# Altium PCB INA219_shield.PcbDoc
Units mm, origin at the board's own origin, x right, y up, seen from the top; angles counter-clockwise.
Board outline 41.38 x 28 mm, 2 copper layers (Top Layer, Bottom Layer), stack 1.571 mm thick; 13 components, 9 nets, 44 pads, 75 vias.
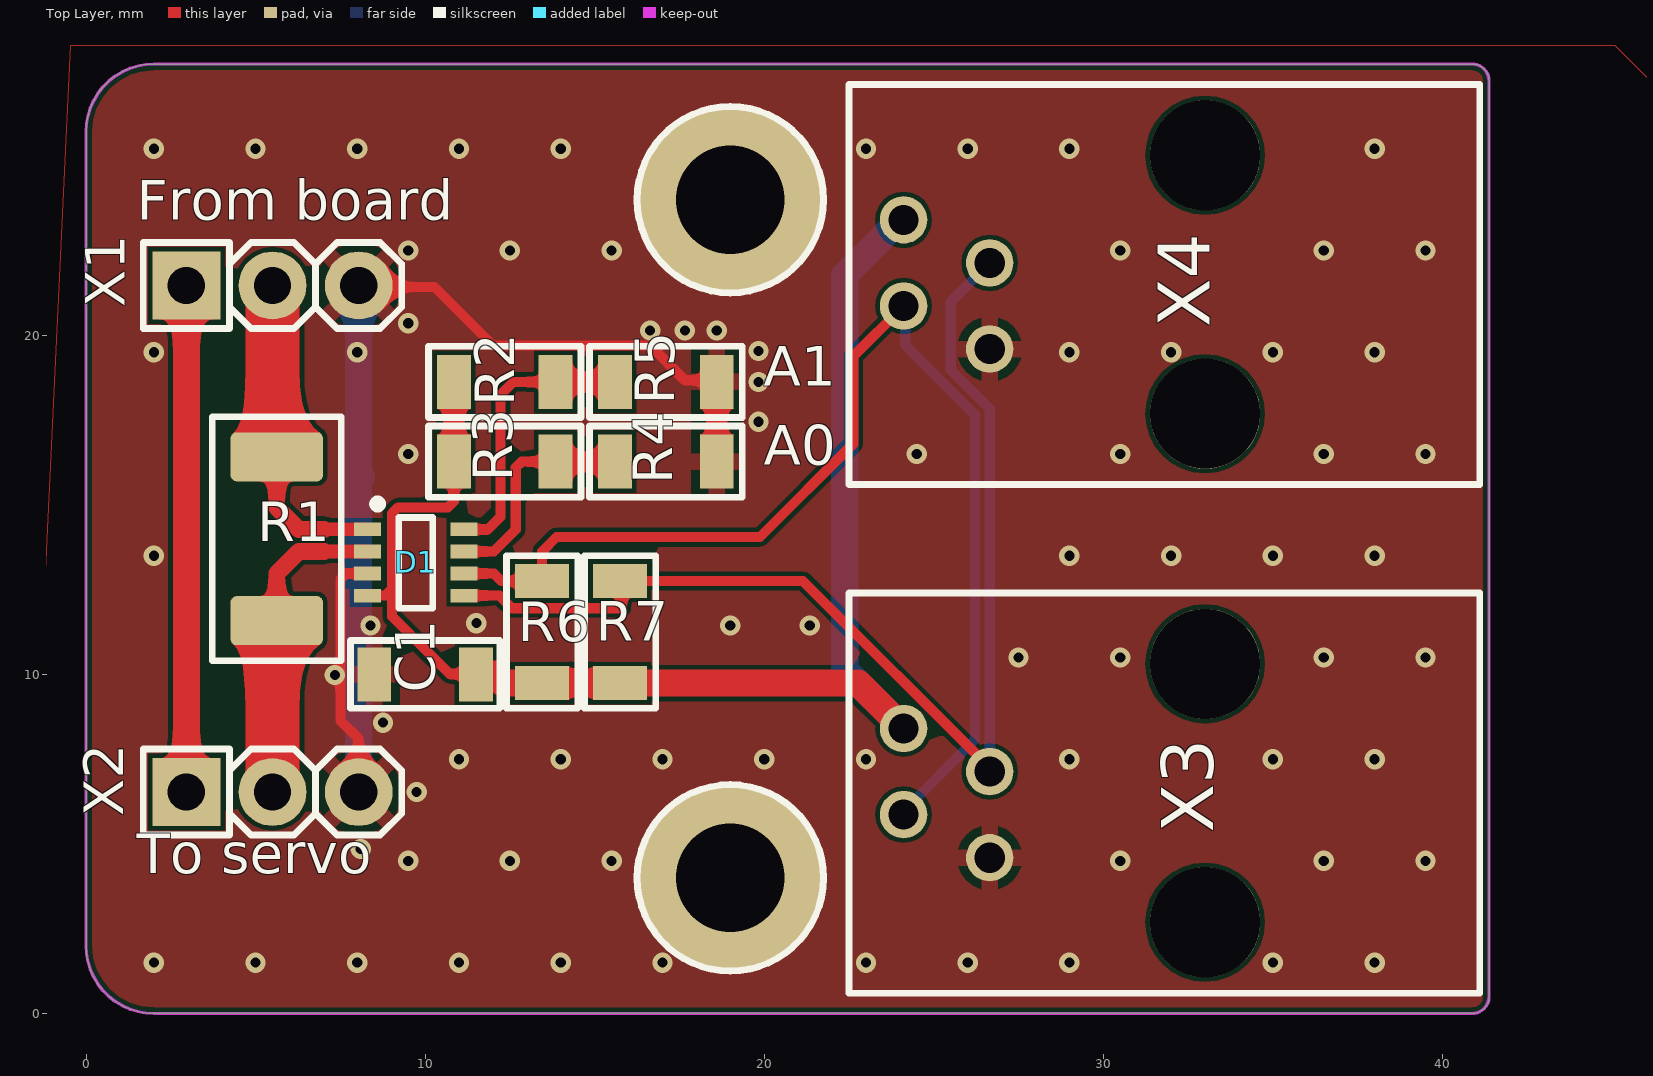
[diagram p0: Top Layer view]
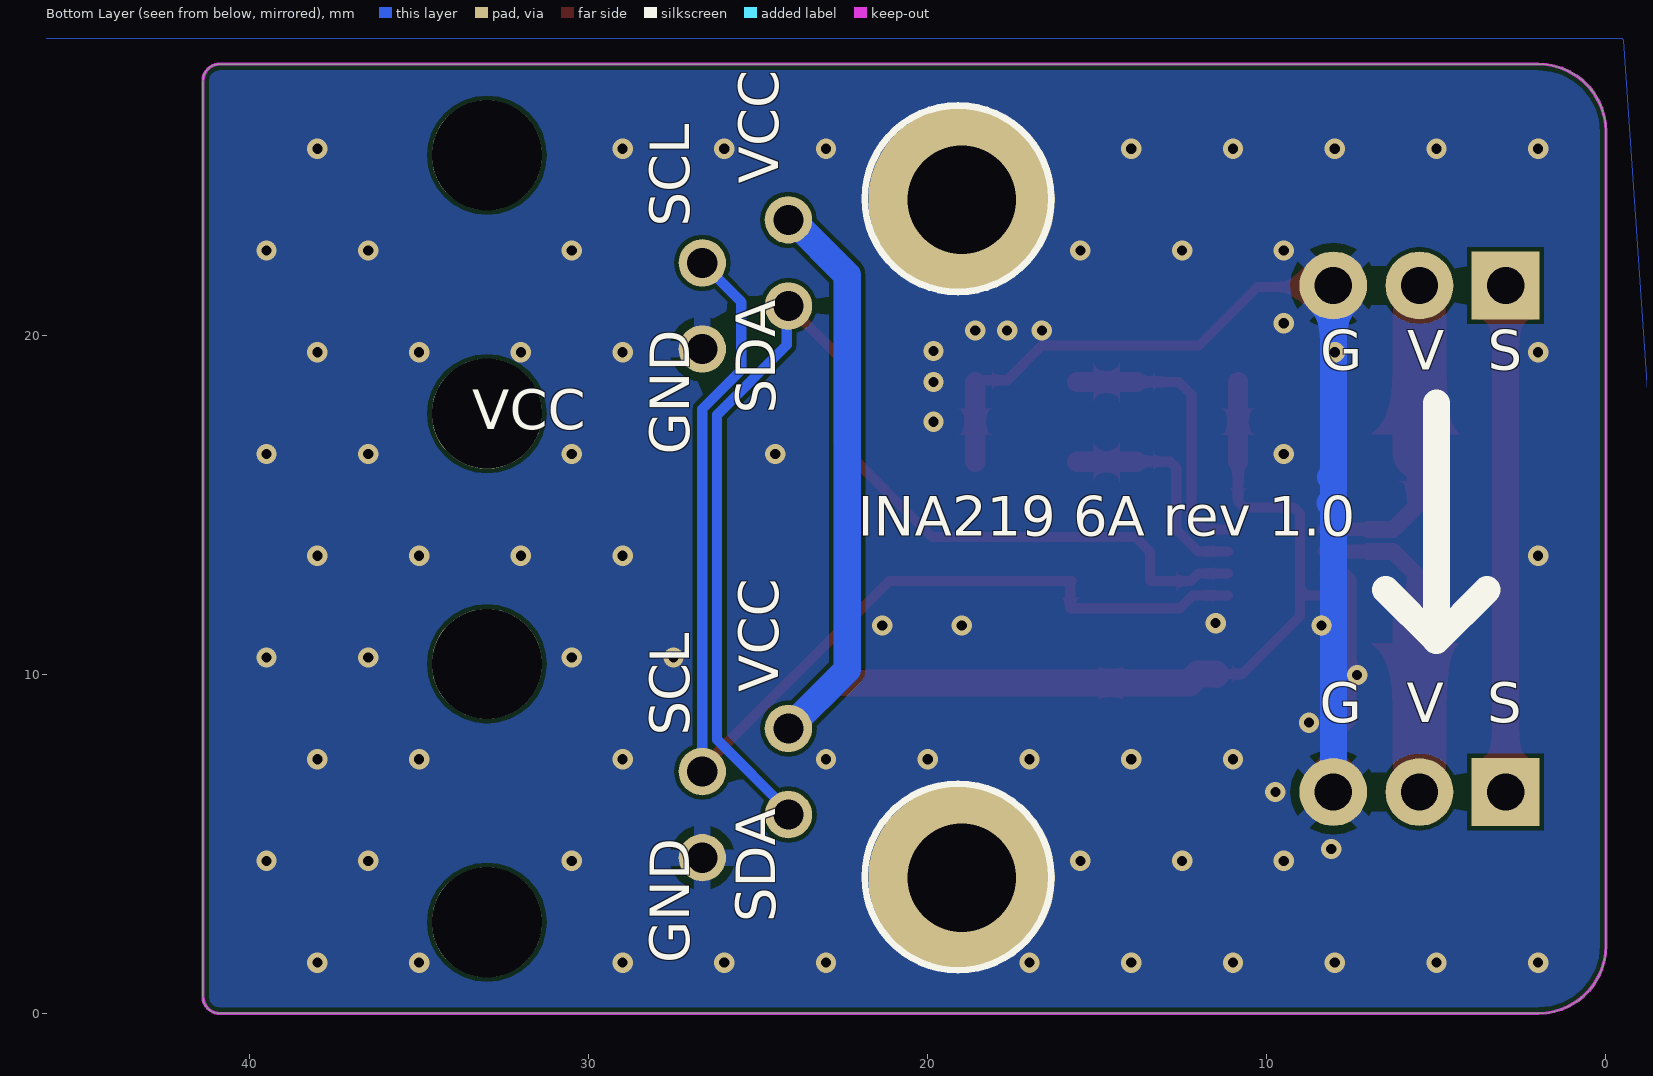
[diagram p1: Bottom Layer view, seen from below]
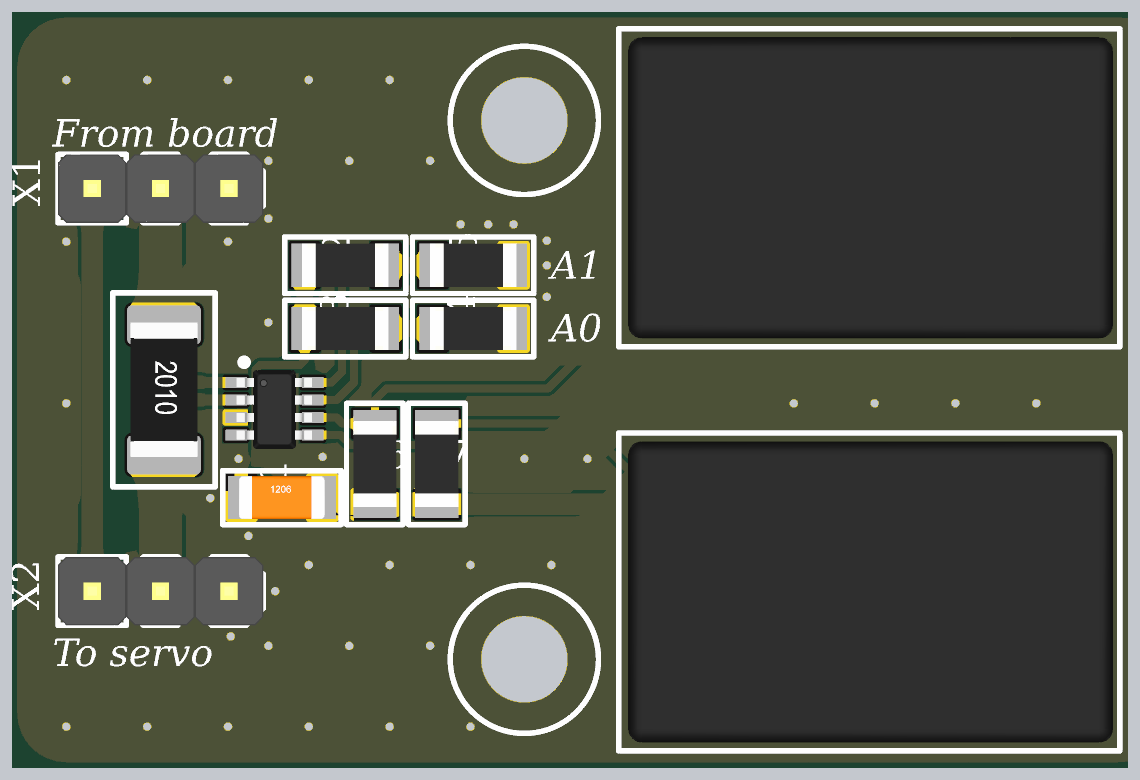
[diagram p2: 3D render of the assembled board from above, using the file's embedded part models]

## Layer stack, top to bottom
Top Solder: solder mask 0.0102, Solder Resist, Dk 3.5
Top Layer: signal copper 0.0356
Dielectric 1: dielectric 1.5, FR-4, Dk 4.8
Bottom Layer: signal copper 0.0356
Bottom Solder: solder mask 0.0102, Solder Resist, Dk 3.5

## Board outline
2,0 cw(c2,2) 0,2 0,26 cw(c2,26) 2,28 40.875,28 cw(c40.875,27.5) 41.375,27.5 41.375,0.5 cw(c40.875,0.5) 40.875,0

## Design rules (kind name [scope] priority, off if disabled: settings)
Clearance [All] p1: gap=0.125 ignorepadtopadclearanceinfootprint=FALSE except(0: Arc-Hole Track-Hole SMDPad-Hole THPad-Hole Via-Hole Fill-Hole Poly-Hole Region-Hole Text-Hole)
ComponentClearance ComponentClearance_Servos [InComponentClass('ServoCOnnectors')] p1: gap=-0.2 collisioncheckmode=3 verticalgap=2540 showdistances=FALSE
ComponentClearance [All] p2: gap=0 collisioncheckmode=3 verticalgap=0 showdistances=FALSE
PolygonConnect [All] p1: connectstyle=Direct reliefconductorwidth=0.5 reliefentries=4 polygonreliefangle="45 Angle" airgapwidth=0.254
RoutingVias [All] p1: holewidth=0.3 width=0.6 viastyle="Through Hole" minholewidth=0.3 minwidth=0.6 maxholewidth=3.2 maxwidth=5.5
SolderMaskExpansion [All] p1: expansion=0.102 istentingtop=FALSE
UnRoutedNet [All] p1: checkbadconnections=TRUE
Width [All] p1: maxlimit=10 minlimit=0.15 preferedwidth=0.5
28 further rules are at their usual default settings.

## Components (designator, comment, footprint, x,y, rotation, side; value= is the part's Value field where it differs from the comment)
C1 "#NAME?" "CAP: 1206" 10,10 r0 top value=0.1μF
D1 "INA219" SOT23-8 9.725,13.3 r0 top
R1 "0.05" R2010 5.625,14 r270 top
R2 "0" R1206 12.35,18.625 r0 top
R3 "0" R1206 12.35,16.275 r0 top
R4 "10k" R1206 17.1,16.275 r0 top
R5 "10k" R1206 17.1,18.625 r0 top
R6 "10k" R1206 13.45,11.25 r90 top
R7 "10k" R1206 15.75,11.25 r90 top
X1 "PLS-3" PLS-3 5.5,21.47 r0 top
X2 "PLS-3" PLS-3 5.5,6.53 r0 top
X3 "=Comment" RJ-9_4p4c 33,6.5 r270 top
X4 "=Comment" RJ-9_4p4c 33,21.5 r270 top

## Footprints (in the part's own frame and the unit in brackets; to place one, negate y for a bottom-side part, rotate by r counter-clockwise, add the part's x,y. Pads: shape width x height; smd on the part's side, far side on the other; paste and mask are expansions set on the pad)
"CAP: 1206" [mm]
  rect 1x1.6 smd: 1(-1.5,0) 2(1.5,0)
  silkscreen extent -2.2,-1 2.2,1, body extent -1.6,-0.8 1.6,0.8, height 1
PLS-3 [mm]
  rect 2x2 hole 1.1: 1(-2.54,0)
  round 2 hole 1.1: 2(0,0) 3(2.54,0)
  silkscreen extent -3.81,-1.27 3.81,1.27, body extent -3.81,-1.27 3.81,1.27, height 8.54
R1206 [mm]
  rect 1x1.6 smd: 1(1.5,0) 2(-1.5,0)
  silkscreen extent -2.25,-1.05 2.25,1.05, body extent -1.6,-0.8 1.6,0.8, height 0.6
R2010 [mm]
  rrect25% 1.45x2.73 smd: 1(-2.415,0) 2(2.415,0)
  silkscreen extent -3.6,-1.9 3.6,1.9, body extent -2.5,-1.25 2.5,1.25, height 0.6
RJ-9_4p4c [mm]
  round 1.398 hole 0.89: 1(-1.905,-8.89) 2(-0.635,-6.35) 3(0.635,-8.89) 4(1.905,-6.35)
  round 3.25 hole 3.25 unplated: ""(-3.81,0) ""(3.81,0)
  silkscreen extent -5.9,-10.5 5.9,8.1, body extent -5.59,-10.15 5.59,7.85, height 11.65
SOT23-8 [mm]
  rect 0.8x0.4 smd: 1(-1.425,0.975) 2(-1.425,0.325) 3(-1.425,-0.325) 4(-1.425,-0.975) 5(1.425,-0.975) 6(1.425,-0.325) 7(1.425,0.325) 8(1.425,0.975)
  silkscreen extent -1.25,-1.35 0.5,1.85, body extent -1.4,-1.5 1.4,1.45, height 1.2

## Part data
C1: library part Ceramic_1206, Manufacturer=Yageo, Package=1206, PartNumber=CC1206KRX7R9BB104, Temperature=-55...+125°C, Tolerance=±10%, TypeCapacitor="Ceramic capacitor", TypeDielectric=X7R, Voltage=50V, HelpURL=https://lcsc.com/product-detail/Multilayer-Ceramic-Capacitors-MLCC-SMD-SMT_100nF-104-10-50V_C82601.html, ValueManufacturerPartNumber=#NAME?
D1: Manufacture="Texas Instruments", Part number=INA219AIDCNR, Help URL=https://lcsc.com/product-detail/PMIC-Current-Power-Monitors-Regulators_Texas-Instruments_INA219AIDCNR_Texas-Instruments-Texas-Instruments-INA219AIDCNR_C87469.html, Model=INA219AIDCNR
R1: library part Резистор, Case=2010, Manufacturing=YAGEO, Part number=RL2010FK-070R05L, Help URL=https://lcsc.com/product-detail/Others_YAGEO-RL2010FK-070R05L_C309643.html, Model=RL2010FK-070R05L
R2 R3: library part Резистор, Case=1206, Manufacturing=YAGEO, Part number=RC1206FR-070RL, Help URL=https://lcsc.com/product-detail/_RC1206FR-070RL_C137394.html, Model=RC1206FR-070RL
R4 R5 R6 R7: library part Резистор, Case=1206, Manufacturing=YAGEO, Part number=RC1206FR-0710KL, Help URL=https://lcsc.com/product-detail/Chip-Resistor-Surface-Mount_10KR-1002-1_C132649.html, Model=RC1206FR-0710KL
X3 X4: library part rj-11, Contact_1=VCC, Contact_2=SCL, Contact_3=SDA, Contact_4=GND
X1 X2: Contact_1=Signal, Contact_2=VCC, Contact_3=GND

## Free pads (board coordinates)
  round 5.5 hole 3.2 mask+0.102: ""(19,4) ""(19,24)

## Via types
v1: diameter 0.6, hole 0.3, Top Layer to Bottom Layer, tented both sides, 75 vias

## Nets (pads, with @x,y where several pads share a name; then routed paths per layer and width w, separated by ;. In a path a pad name is that pad's centre, name@x,y a point inside that pad or via, vN(x,y) a via of type N, cw(c..) or ccw(c..) an arc to the next point about the centre after c; other vN are vias at no path point)
+3V3: C1.2 D1.4 R2.2 R3.2 R6.2 R7.2 X3.1 X4.1 | length 42.3
  Top Layer w0.3: D1.4 8.825,12.325 9.025,12.525 ; R3.2 10.85,15.101 10.674,14.925 9.201,14.925 9.025,14.749 9.025,12.525 ; C1.2@11.49,10.01 10.726,10.01 9.025,11.711 9.025,12.525
  Top Layer w0.6: R3.2 R2.2
  Top Layer w0.8: C1.2 11.51,10.01 12.025,10.01 12.285,9.75 R6.2 R7.2 22.765,9.75 X3.1
  Bottom Layer w0.8: X3.1 22.375,10.14 22.375,21.775 24.005,23.405 X4.1
GND: C1.1 D1.3 pad. R4.1 R5.1 X1.3 X2.3 X3.4 X4.4 | length 36.6
  Top Layer w0.3: X2.3 8.04,8.1 7.5,8.64 7.5,12.799 7.676,12.975 D1.3 ; X1.3 8.085,21.425 10.275,21.425 12,19.7 16.634,19.7 17.659,18.675 18.55,18.675 R5.1
  Top Layer w0.6: R4.1 R5.1
  Bottom Layer w0.8: X2.3 8.04,15.15 ; X1.3 8.04,15.9 ; 8.115,15.825 8.04,15.9 ; 8.14,15.05 8.04,15.15 ; 8.04,15.15 8.04,15.9
  other v1: 2,1.5 5,1.5 8,1.5 11,1.5 14,1.5 17,1.5 23,1.5 26,1.5 29,1.5 35,1.5 38,1.5 9.5,4.5 12.5,4.5 15.5,4.5 30.5,4.5 36.5,4.5 39.5,4.5 8.1,4.85 9.75,6.53 11,7.5 14,7.5 17,7.5 20,7.5 23,7.5 29,7.5 35,7.5 38,7.5 8.76,8.579 7.34,9.984 27.5,10.5 30.5,10.5 36.5,10.5 39.5,10.5 8.389,11.441 19,11.441 21.341,11.441 11.51,11.513 2,13.5 29,13.5 32,13.5 35,13.5 38,13.5 9.5,16.5 24.5,16.5 30.5,16.5 36.5,16.5 39.5,16.5 19.833,17.45 19.833,18.622 2,19.5 8,19.5 29,19.5 32,19.5 35,19.5 38,19.5 19.833,19.537 16.634,20.142 17.659,20.142 18.6,20.142 9.5,20.356 9.5,22.5 12.5,22.5 15.5,22.5 30.5,22.5 36.5,22.5 39.5,22.5 2,25.5 5,25.5 8,25.5 11,25.5 14,25.5 23,25.5 26,25.5 29,25.5 38,25.5
NetD1_1: D1.1 R1.1 X1.2 | length 9.5
  Top Layer w0.4: 7.025,14.275 D1.1
  Top Layer w0.5: R1.1 5.625,14.925 6.275,14.275 7.025,14.275
  Top Layer w0.8: R1.1@5.5,16.54 R1.1
  Top Layer w1.6: R1.1@5.5,16.54 X1.2
NetD1_2: D1.2 R1.2 X2.2 | length 9.5
  Top Layer w0.4: 7.025,13.625 D1.2
  Top Layer w0.5: R1.2 5.625,12.975 6.275,13.625 7.025,13.625
  Top Layer w0.8: R1.2@5.5,11.46 R1.2
  Top Layer w1.6: X2.2@5.5,6.489 R1.2@5.5,11.46
NetD1_5: D1.5 R7.1 X3.2 X4.2 | length 34.9
  Top Layer w0.3: D1.5 11.85,12.325 12.186,12.325 12.561,11.95 15.799,11.95 15.799,12.701 R7.1 21.142,12.75 26.65,7.242 X3.2
  Bottom Layer w0.3: X3.2 26.65,17.825 25.5,18.975 25.5,20.985 X4.2
NetD1_6: D1.6 R6.1 X3.3 X4.3 | length 35.2
  Top Layer w0.3: D1.6 12.025,12.975 12.25,12.75 R6.1 13.45,13.625 13.875,14.05 19.875,14.05 22.625,16.8 22.625,19.38 X4.3
  Bottom Layer w0.3: X3.3 24.11,5.972 26.212,8.074 26.212,17.662 24.158,19.716 24.158,20.817 X4.3
NetD1_7: D1.7 R3.1 R4.2 | length 6.6
  Top Layer w0.3: D1.7 12.025,13.625 12.675,14.275 12.675,16.099 12.851,16.275 R3.1
  Top Layer w0.6: R3.1 R4.2
NetD1_8: D1.8 R2.1 R5.2 | length 8.4
  Top Layer w0.3: D1.8 11.85,14.275 12.225,14.65 12.225,18.25 12.6,18.625 R2.1
  Top Layer w0.6: R2.1 R5.2
NetX1_1: X1.1 X2.1 | length 14.9
  Top Layer w0.8: X2.1 X1.1
pads on no net: X3. X4.

## Polygon pours and split planes (outlines as drawn)
GND on Bottom Layer "GND_L02_P010" (solid, remove dead copper, pour order 10): 0,28 42.6,28 42.6,0 0,0
GND on Bottom Layer "NONET_L02_P000" (solid, remove dead copper, shelved, pour order 0): -0.525,28.7 -0.475,28.75 49.325,28.75 49.325,-0.825 47.775,-2.375 46.65,-1.25 -2.575,-1.25
GND on Top Layer "GND_L01_P011" (solid, remove dead copper, pour order 11): 0,28 42.6,28 42.6,0 0,0
GND on Top Layer "GND_L01_P004" (solid, remove dead copper, pour order 4): -5.1,17.725
GND on Top Layer "GND_L01_P003" (solid, remove dead copper, pour order 3): -5.2,17.075
GND on Top Layer "NONET_L01_P001" (solid, remove dead copper, shelved, pour order 1): -0.45,28.55 45.075,28.55 46.375,27.25 46.375,-2.35 -0.1,-2.35 -1.85,-0.6

## Keep-outs
Keep-Out Layer:
  the board outline again, w0.1

## Silkscreen, mask and mechanical layers (free items; w line width, h text height)
Top Overlay:
  circle w0.2: c19,24 r2.75
  circle w0.2: c19,4 r2.75
  text "From board" at 1.489,23.027 h2
  text "A1" at 19.989,18.125 h2
  text "A0" at 19.989,15.8 h2
  text "To servo" at 1.489,3.752 h2
Bottom Overlay:
  circle w0.2: c19.107,24.027 r2.75
  circle w0.2: c19.107,4.027 r2.75
  lines w0.8: 3.504,12.496 5,11 ; 5,18 5,11 ; 5.004,11 5,11 ; 6.5,12.496 6.496,12.496 5,11
  text "VCC" at 24.025,24.473 h2 r270
  text "SCL" at 26.65,23.196 h2 r270
  text "S" at 3.481,18.6 h2
  text "V" at 5.855,18.6 h2
  text "G" at 8.425,18.6 h2
  text "SDA" at 24.11,17.686 h2 r270
  text "VCC" at 33.427,16.85 h2
  text "GND" at 26.65,16.478 h2 r270
  text "INA219 6A rev 1.0" at 22.061,13.702 h2
  text "VCC" at 24.025,9.473 h2 r270
  text "S" at 3.504,8.2 h2
  text "V" at 5.877,8.2 h2
  text "G" at 8.447,8.2 h2
  text "SCL" at 26.65,8.196 h2 r270
  text "SDA" at 24.11,2.686 h2 r270
  text "GND" at 26.65,1.478 h2 r270